# Altium PCB Sitara_Project_Rev_A_PCB.PcbDoc (part 4 of 9)
Units mm, origin at the board's own origin, x right, y up, seen from the top; angles counter-clockwise.
Board outline 120 x 85 mm, 8 copper layers (L1 (Sig), L2 (GND), L3 (PWR), L4 (Sig), L5 (GND), L6 (Sig), L7 (GND), L8 (Sig)), stack 1.188 mm thick; 458 components, 357 nets, 1916 pads, 1164 vias.
Unrouted connection lines stored in the file: 516.
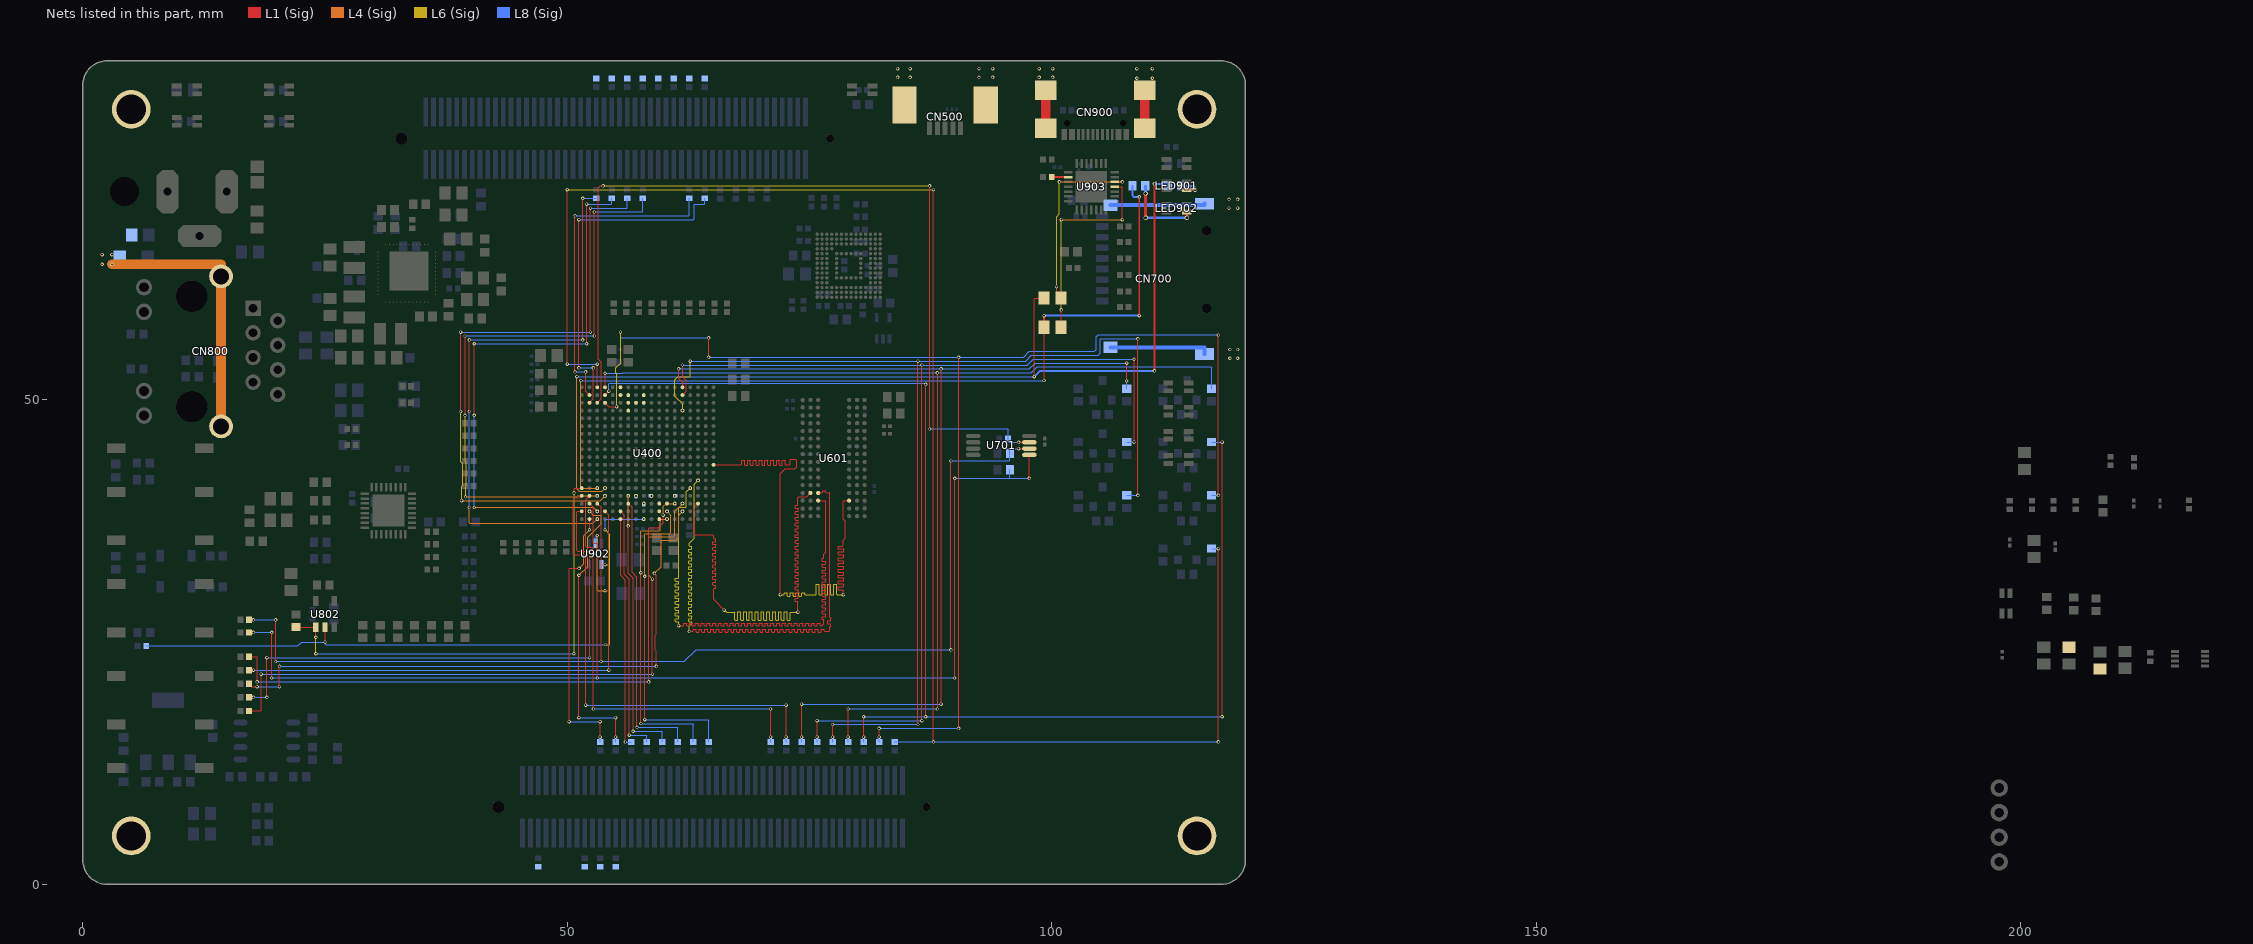
[diagram p7: the nets of this part, all layers, seen from the top]

## Part data
C300: library part CAP_22uF/25V/2012, "Ceramic CAP_22uF/25V/2012", JLCPCB Part Type="Basic Part", LCSC Part #=C45783
C301 C302 C303 C307 C308 C311 C315: library part CAP_100nF/50V/1608, "Ceramic CAP_100nF/50V/1608", JLCPCB Part Type="Basic Part", LCSC Part #=C14663
C304 C313 C316 C317 C318 C319 C320 C321 C322 C323 C324 C325 C328 C329 C414 C420 C427 C428 C448 C449 C464 C465 C701 C800: library part CAP_10uF/25V/1608, "Ceramic CAP_10uF/25V/1608", JLCPCB Part Type="Basic Part", LCSC Part #=C96446
C305 C309 C704 C710: library part CAP_10uF/10V/1608, "Ceramic CAP_10uF/10V/1608", JLCPCB Part Type="Basic Part", LCSC Part #=C19702
C306 C310 C326 C327 C709: library part CAP_2.2uF/16V/1608, "Ceramic CAP_2.2uF/16V/1608", JLCPCB Part Type="Basic Part", LCSC Part #=C23630
C312 C804: library part CAP_470pF/50V/1608, "Ceramic CAP_470pF/50V/1608", JLCPCB Part Type="Basic Part", LCSC Part #=C1620
C314 C803: library part CAP_1uF/50V/1608, "Ceramic CAP_1uF/50V/1608", JLCPCB Part Type="Basic Part", LCSC Part #=C15849
C400 C401 C405 C412 C413: library part CAP_1uF/16V/0603, "Ceramic CAP_1uF/16V/0603", JLCPCB Part Type="Extended Part", LCSC Part #=C307385
C402 C403 C404 C406 C407 C408 C409 C410 C411 C415 C416 C417 C418 C419 C421 C422 C423 C424 C425 C426 C429 C430 C431 C432 C433 C434 C435 C436 C437 C438 C439 C440 C441 C442 C443 C444 C445 C446 C447 C450 C451 C452 C453 C454 C455 C456 C457 C458 C459 C460 C461 C462 C463 C466 C467 C468 C469 C470 C471 C472 C473 C501 C502 C503 C505 C625 C700 C703 C900 C902 C905: library part CAP_100nF/25V/0603, "Ceramic CAP_100nF/25V/0603", JLCPCB Part Type="Extended Part", LCSC Part #=C181047
C500 C901 C903: library part CAP_4.7uF/10V/1005, "10V 4.7uF X5R ±20% 0402  Multilayer Ceramic Capacitors MLCC - SMD/SMT ROHS", JLCPCB Part Type="Basic Part", LCSC Part #=C23733
C504: library part CAP_1nF/50V/0603, "Ceramic CAP_1nF/50V/0603", JLCPCB Part Type="Extended Part", LCSC Part #=C85934
C600 C601 C603 C604 C605 C606 C607 C608 C609 C610 C611 C612 C613 C614 C615 C616 C617 C618 C619 C620 C621 C622 C623 C624: library part CAP_47nF/16V/0603, "16V 47nF X5R ±10% 0201 Multilayer Ceramic Capacitors MLCC - SMD/SMT ROHS", JLCPCB Part Type="Extended Part", LCSC Part #=C88917
C602: library part CAP_1nF/50V/1005, "Ceramic CAP_1nF/50V/1005", JLCPCB Part Type="Basic Part", LCSC Part #=C1523
C702 C705 C706 C707 C708 C711 C712 C713 C714 C801 C802 C808: library part CAP_100nF/16V/1005, "Ceramic CAP_100nF/16V/1005", JLCPCB Part Type="Basic Part", LCSC Part #=C1525
C805 C806: library part CAP_18pF/50V/1608, "Ceramic CAP_18pF/50V/1608", JLCPCB Part Type="Basic Part", LCSC Part #=C1647
C807: library part CAP_4.7uF/16V/1608, "Ceramic CAP_4.7uF/16V/1608", JLCPCB Part Type="Basic Part", LCSC Part #=C19666
C809 C810 C811 C812: library part CAP_10pF/50V/1608, "Ceramic CAP_10pF/50V/1608", JLCPCB Part Type="Basic Part", LCSC Part #=C1634
C813 C814: library part CAP_10nF/50V/1608, "Ceramic CAP_10nF/50V/1608", JLCPCB Part Type="Basic Part", LCSC Part #=C57112
C904: library part CAP_1uF/25V/1005, "Ceramic CAP_1uF/25V/1005", JLCPCB Part Type="Basic Part", LCSC Part #=C52923
C1000: library part CAP_1nF/2kV/3216, "Ceramic CAP_1nF/2kV/3216", JLCPCB Part Type="Basic Part", LCSC Part #=C9196
CN300: library part CON_DC-Jack, ComponentLink1Description="Manufacturer Link", ComponentLink1URL=http://www.cliffuk.co.uk/
CN500: library part CON_USB2.0-Mini-B, "USB - mini B USB 2.0 Receptacle Connector 5 Position Surface Mount, Right Angle", JLCPCB Part Type="Extended Part", LCSC Part #=C2692070
CN700: library part CON_MICRO-SD_Socket_TF-01A, "Card Slot MicroSD card (TF card) Self-bouncing SMD SD Card / Memory Card Connector ROHS", JLCPCB Part Type="Extended Part", LCSC Part #=C91145
CN800: library part CON_RJ45_HR911105A, "RJ45Receptacle 1 WithLED Plugin Ethernet Connectors / Modular Connectors (RJ45 RJ11) ROHS", JLCPCB Part Type="Extended Part", LCSC Part #=C12074
CN900: library part CON_USB-Type-C, "USB 2.0 5A 1 Surface Mount 16 Female -35℃~+75℃ Type-C SMD  USB Connectors ROHS", JLCPCB Part Type="Extended Part", LCSC Part #=C2977718
CN1000 CN1001: library part CON_BergStak-Lite(0.8mm)_MALE-100P(10144517-101802LF), JLCPCB Part Type="Extended Part"
CN1002: library part CON_PIN_HEADER_SINGLE-4PIN(2.54MM), "CON_PIN_HEADER_SINGLE-4PIN(2.54MM)"
D300 D301: library part DIO_B5819W, "40V 600mV@1A 1A SOD-123  Schottky Barrier Diodes (SBD) ROHS", JLCPCB Part Type="Basic Part", LCSC Part #=C8598
FB400 FB401 FB402 FB800: library part FB_BLM21PG121SN1D, "3A 1 30mΩ 120Ω@100MHz ±25% 0805  Ferrite Beads ROHS", JLCPCB Part Type="Extended Part", LCSC Part #=C79382
H1000 H1001 H1002 H1003: library part HOLE_PTH-3.0MM, "Plated-Through Hole 3mm"
L300 L301 L302: library part IND_LQM2HPN2R2MG0L, "2.2 µH Shielded Multilayer Inductor 1.3 A 100mOhm Max 1008 (2520 Metric)", JLCPCB Part Type="Extended Part", LCSC Part #=C86092
LED300 LED301 LED302 LED303 LED500 LED900: library part LED_MHT170RGBCT(GREEN), "Colorless transparence -30℃~+85℃ Positive post Common anode RGB 120° 0805  Light Emitting Diodes (LED) ROHS", JLCPCB Part Type="Extended Part", LCSC Part #=C2962094
LED501 LED502 LED503 LED504 LED901 LED902: library part LED_MHT170RGBCT(BLUE), "Colorless transparence -30℃~+85℃ Positive post Common anode RGB 120° 0805  Light Emitting Diodes (LED) ROHS", JLCPCB Part Type="Extended Part", LCSC Part #=C2962094
LED800: library part LED_RGB_MHT170RGBCT, "Colorless transparence -30℃~+85℃ Positive post Common anode RGB 120° 0805  Light Emitting Diodes (LED) ROHS", JLCPCB Part Type="Extended Part", LCSC Part #=C2962094
Q500 Q501 Q502 Q503 Q800 Q801 Q802: library part FET_2N7002, "60V 115mA 200mW 7.5Ω@10V,500mA N Channel SOT-23  MOSFETs ROHS", JLCPCB Part Type="Basic Part", LCSC Part #=C8545
R300 R309 R310 R311 R312 R313 R314 R315 R316 R317 R319 R336 R500 R717 R742 R836 R843 R844 R845 R846 R900 R903 R913 R914: library part RES_0R/2012/0.125W, "RES_0R/2012/0.125W", JLCPCB Part Type="Basic Part", LCSC Part #=C17477, Power Rating=0.125W, Precision=1%, Size=2012
R301 R304 R305 R514: library part RES_100K/1608/0.1W, "RES_100K/1608/0.1W", JLCPCB Part Type="Basic Part", LCSC Part #=C25803, Power Rating=0.1W, Precision=1%, Size=1608
R302 R303: library part RES_NC_10K/1608/0.1W, "RES_10K/1608/0.1W", Power Rating=0.1W, Precision=1%, Size=1608
R306: library part RES_680R/2012/0.125W, "RES_680R/2012/0.125W", JLCPCB Part Type="Basic Part", LCSC Part #=C17798, Power Rating=0.125W, Precision=1%, Size=2012
R307: library part RES_4.7K/1608/0.1W, "RES_4.7K/1608/0.1W", JLCPCB Part Type="Basic Part", LCSC Part #=C23162, Power Rating=0.1W, Precision=1%, Size=1608
R308 R322 R323 R324 R325 R329 R330 R332 R400 R401 R724 R817 R818 R910 R1003 R1009 R1010 R1011 R1012 R1013 R1014 R1015 R1016 R1017 R1018 R1019 R1020 R1021 R1022 R1023 R1027 R1028 R1029 R1030 R1031 R1032 R1033 R1034 R1035 R1036 R1037 R1038 R1039 R1041 R1042 R1044 R1045 R1046 R1047 R1048 R1049 R1050 R1052: library part RES_0R/1005/62.5mW, "RES_0R/1005/62.5mW", JLCPCB Part Type="Basic Part", LCSC Part #=C17168, Power Rating=62.5mW, Precision=1%, Size=1005
R318 R331 R334: library part RES_510R/1608/0.1W, "RES_510R/1608/0.1W", JLCPCB Part Type="Basic Part", LCSC Part #=C23193, Power Rating=0.1W, Precision=1%, Size=1608
R320 R321: library part RES_1.5K/2012/0.125W, "RES_1.5K/2012/0.125W", JLCPCB Part Type="Basic Part", LCSC Part #=C4310, Power Rating=0.125W, Precision=1%, Size=2012
R326: library part RES_200K/1608/0.1W, "RES_200K/1608/0.1W", JLCPCB Part Type="Basic Part", LCSC Part #=C25811, Power Rating=0.1W, Precision=1%, Size=1608
R327 R328 R518 R519 R702 R909: library part RES_4.7K/1005/62.5mW, "RES_4.7K/1005/62.5mW", JLCPCB Part Type="Basic Part", LCSC Part #=C25900, Power Rating=62.5mW, Precision=1%, Size=1005
R333: library part RES_330K/1608/0.1W, "RES_330K/1608/0.1W", JLCPCB Part Type="Basic Part", LCSC Part #=C23137, Power Rating=0.1W, Precision=1%, Size=1608
R335 R711 R718 R820 R821 R915: library part RES_0R/1608/0.1W, "RES_0R/1608/0.1W", JLCPCB Part Type="Basic Part", LCSC Part #=C21189, Power Rating=0.1W, Precision=1%, Size=1608
R337 R901 R902: library part RES_NC_0R/2012/0.125W, "0R/2012/0.125W/NC", Power Rating=0.1W, Precision=1%, Size=1608
R517 R823: library part RES_100R/1608/0.1W, "RES_100R/1608/0.1W", JLCPCB Part Type="Basic Part", LCSC Part #=C22775, Power Rating=0.1W, Precision=1%, Size=1608
R520 R907: library part RES_1K/1608/0.1W, "RES_1K/1608/0.1W", JLCPCB Part Type="Basic Part", LCSC Part #=C21190, Power Rating=0.1W, Precision=1%, Size=1608
R521 R541 R545 R723: library part RES_0R/0603/50mW, "50mW Thick Film Resistors 25V ±1% 0Ω 0201  Chip Resistor - Surface Mount ROHS", JLCPCB Part Type="Extended Part", LCSC Part #=C106227, Power Rating=50mW, Precision=1%, Size=0603
R535: library part RES_NC_100K/1608/0.1W, "RES_100K/1608/0.1W", Power Rating=0.1W, Precision=1%, Size=1608
R538 R601 R602 R603 R703 R704 R705 R706 R707 R708 R709 R720 R721 R722 R726 R727 R728 R729 R730 R731 R732 R733: library part RES_10K/1005/62.5mW, "RES_10K/1005/62.5mW", JLCPCB Part Type="Basic Part", LCSC Part #=C25744, Power Rating=62.5mW, Precision=1%, Size=1005
R539 R546 R549 R554 R833 R835 R838 R849 R850: library part RES_470R/1608/0.1W, "RES_470R/1608/0.1W", JLCPCB Part Type="Basic Part", LCSC Part #=C23179, Power Rating=0.1W, Precision=1%, Size=1608
R542 R547 R551 R555 R822 R847 R851 R853: library part RES_12K/1608/0.1W, "RES_12K/1608/0.1W", JLCPCB Part Type="Basic Part", LCSC Part #=C22790, Power Rating=0.1W, Precision=1%, Size=1608
R544 R548 R552 R556 R848 R852 R854: library part RES_22R/1608/0.1W, "RES_22R/1608/0.1W", JLCPCB Part Type="Basic Part", LCSC Part #=C23345, Power Rating=0.1W, Precision=1%, Size=1608
R600: library part RES_1.5K/1005/62.5mW, "RES_1.5K/1005/62.5mW", JLCPCB Part Type="Basic Part", LCSC Part #=C25867, Power Rating=62.5mW, Precision=1%, Size=1005
R604: library part RES_240R/1608/0.1W, "RES_240R/1608/0.1W", JLCPCB Part Type="Basic Part", LCSC Part #=C23350, Power Rating=0.1W, Precision=1%, Size=1608
R605 R839 R840 R841 R842: library part RES_49.9R/1005/62.5mW, "RES_49.9R/1005/62.5mW", JLCPCB Part Type="Basic Part", LCSC Part #=C25120, Power Rating=62.5mW, Precision=1%, Size=1005
R700 R701: library part RES_NC_4.7K/1608/0.1W, "RES_4.7K/1608/0.1W", Power Rating=0.1W, Precision=1%, Size=1608
R710 R712 R713 R714 R715 R716 R719 R725 R734 R735 R736 R737 R738 R739 R740 R741 R801 R802 R803 R804 R805: library part RES_22R/1005/62.5mW, "RES_22R/1005/62.5mW", JLCPCB Part Type="Basic Part", LCSC Part #=C25092, Power Rating=62.5mW, Precision=1%, Size=1005
R800 R806 R807 R808 R809 R810 R811 R812 R814 R816: library part RES_100R/1005/62.5mW, "RES_100R/1005/62.5mW", JLCPCB Part Type="Basic Part", LCSC Part #=C25076, Power Rating=62.5mW, Precision=1%, Size=1005
R813 R815: library part RES_NC_0R/1608/0.1W, "0R/1608/0.1W/NC", Power Rating=0.1W, Precision=1%, Size=1608
R819 R824 R829 R830 R831 R832 R834 R837 R908: library part RES_10K/1608/0.1W, "RES_10K/1608/0.1W", JLCPCB Part Type="Basic Part", LCSC Part #=C25804, Power Rating=0.1W, Precision=1%, Size=1608
R825 R826 R827 R828: library part RES_1.5K/1608/0.1W, "RES_1.5K/1608/0.1W", JLCPCB Part Type="Basic Part", LCSC Part #=C22843, Power Rating=0.1W, Precision=1%, Size=1608
R904: library part RES_100K/1005/62.5mW, "RES_100K/1005/62.5mW", JLCPCB Part Type="Basic Part", LCSC Part #=C25741, Power Rating=62.5mW, Precision=1%, Size=1005
R905 R906: library part RES_5.1K/1005/62.5mW, "RES_5.1K/1005/62.5mW", JLCPCB Part Type="Basic Part", LCSC Part #=C25905, Power Rating=62.5mW, Precision=1%, Size=1005
R911 R912: library part RES_680R/1608/0.1W, "RES_680R/1608/0.1W", JLCPCB Part Type="Basic Part", LCSC Part #=C23228, Power Rating=0.1W, Precision=1%, Size=1608
R1056: library part RES_1M/2012/0.125W, "RES_1M/2012/0.125W", JLCPCB Part Type="Basic Part", LCSC Part #=C17514, Power Rating=0.125W, Precision=1%, Size=2012
SW300 SW301 SW500 SW900: library part SW_K2-1102SP-C4SC-04(2P), "-25℃~+85℃ 6mm 5mm Round Button 50mA Brick nogging 6mm SPST 100MΩ 100000 250gf@±30gf 12V SMD  Tactile Switches ROHS", JLCPCB Part Type="Extended Part", LCSC Part #=C127509
U300: library part IC_PMIC_TPS65217CRSLR, "Battery Management, Display (LED Drivers), Handheld/Mobile Devices, Power Supply PMIC 48-VQFN (6x6)", JLCPCB Part Type="Extended Part", LCSC Part #=C116081
U301: library part IC_REG_AMS1117-3.3, "72dB@(120Hz) 1A 1.3V@(800mA) Fixed 3.3V~3.3V Positive 1 SOT-223  Linear Voltage Regulators (LDO) ROHS", JLCPCB Part Type="Basic Part", LCSC Part #=C6186
U302: library part IC_REG_MIC5209YM-TR, "Linear Voltage Regulator IC Positive Adjustable 1 Output 500mA 8-SOIC", JLCPCB Part Type="Extended Part", LCSC Part #=C461593
U400: library part IC_SOC_AM3358BZCZ100, "ARM® Cortex®-A8 Microprocessor IC Sitara™ 1 Core, 32-Bit 1.0GHz 324-NFBGA (15x15)", JLCPCB Part Type="Extended Part", LCSC Part #=C73932
U501: library part DIO_TVS_TPD4S012DRYR, "Clamp 3A (8/20µs) Ipp Tvs Diode Surface Mount 6-SON (1.45x1)", JLCPCB Part Type="Extended Part", LCSC Part #=C96506
U601: library part IC_MEM_DDR3L_D2516ECMDXGJD-U, "DRAM 4Gb 96 ball FBGA DDR3L 1866", JLCPCB Part Type="Extended Part", LCSC Part #=C2927180
U701: library part IC_EEPROM_AT24C16, "IC EEPROM 16KBIT I2C 1MHZ 8TSSOP", JLCPCB Part Type="Extended Part", LCSC Part #=C112954
U702: library part IC_BUF_SN74LVC1G06DCKR, "Inverter IC 1 Channel Open Drain SC-70-5", JLCPCB Part Type="Extended Part", LCSC Part #=C7828
U703: library part IC_eMMC_MTFC32GAZAQHD-WT, "FLASH - NAND Memory IC 256Gbit MMC 200 MHz 153-VFBGA (11.5x13)", JLCPCB Part Type="Extended Part", LCSC Part #=C5330430
U800: library part IC_ETH_LAN8710A-EZC-TR, "4/4 Transceiver Full MII, RMII 32-QFN (5x5)", JLCPCB Part Type="Extended Part", LCSC Part #=C46185
U802: library part IC_AND_SN74AHC1G09DBVR, "AND Gate IC 1 Channel Open Drain SOT-23-5", JLCPCB Part Type="Extended Part", LCSC Part #=C840099
U900: library part IC_BUF_SN74LVC2G241DCUR, "Buffer, Non-Inverting 2 Element 1 Bit per Element 3-State Output 8-VSSOP", JLCPCB Part Type="Extended Part", LCSC Part #=C10430
U902: library part IC_BUF_SN74LVC1G07DCKR, "Buffer, Non-Inverting 1 Element 1 Bit per Element Open Drain Output SC-70-5", JLCPCB Part Type="Extended Part", LCSC Part #=C7830
U903: library part IC_USB_CP2102, "Transceiver 1Mbps USB 1/1 QFN-28_5x5x05P  USB ICs ROHS", JLCPCB Part Type="Basic Part", LCSC Part #=C6568
X500: library part OSC_SX2M24.000M20F30TNN(24MHz), "1.62V~3.63V ±20ppm 10mA ±30ppm CMOS 24MHz SMD2520-4P  Crystal Oscillators ROHS", JLCPCB Part Type="Extended Part", LCSC Part #=C2901600
X501: library part OSC_SX2M32.768KM20F30TNN(32.768kHz), "1.62V~3.63V ±20ppm 90uA ±30ppm CMOS 32.768kHz SMD2520-4P  Crystal Oscillators ROHS", JLCPCB Part Type="Extended Part", LCSC Part #=C2901603
X800: library part XTAL_25MHz_X322525MOB4SI, "25MHz Surface Mount Crystal 12pF ±10ppm ±20ppm SMD3225-4P Crystals ROHS", JLCPCB Part Type="Basic Part", LCSC Part #=C9006

## Via types
v1: diameter 0.35, hole 0.2, L1 (Sig) to L8 (Sig), tented both sides, 846 vias
v2: diameter 0.45, hole 0.3, L1 (Sig) to L8 (Sig), tented both sides, 302 vias
v3: diameter 0.45/0.45/0.45/0.45/0.45/0.45/0.45/0.45 (per signal layer), hole 0.3, L1 (Sig) to L8 (Sig), tented both sides, 16 vias

## Nets (pads, with @x,y where several pads share a name; then routed paths per layer and width w, separated by ;. In a path a pad name is that pad's centre, name@x,y a point inside that pad or via, vN(x,y) a via of type N, cw(c..) or ccw(c..) an arc to the next point about the centre after c; other vN are vias at no path point)
AIN1: R1003.2 U400.C7
AIN2: R1023.1 U400.B7 | length 33.1
  L1 (Sig) w0.1: v1(58,17) v1(58,31.8)
  L4 (Sig) w0.1: v1(58,31.8) 58,36.141 58.059,36.2 60.6,36.2 60.7,36.3 60.7,38.1 v1(60.3,38.5)
  L8 (Sig) w0.1: v1(58,17) 64.541,17 64.6,16.941 R1023.1@64.6,14.69
AIN3: R1022.1 U400.A7 | length 31
  L1 (Sig) w0.1: v1(57.6,16.6) v1(57.6,32.162)
  L4 (Sig) w0.1: v1(57.6,32.162) 57.6,36.441 57.659,36.5 59.541,36.5 59.6,36.559 59.6,37.641 59.659,37.7 v1(60.3,37.7)
  L8 (Sig) w0.1: v1(57.6,16.6) 62.941,16.6 63,16.541 R1022.1@63,14.69
AIN4: R1009.2 U400.C8
AIN5: R1011.2 U400.B8
AIN6: R1013.2 U400.A8
AM3_EEPROM_WP: R702.1 U400.T16 U701.7 | length 93.5
  L1 (Sig) w0.1: U400.T16@53.1,49.7 53.5,50.1 53.5,53.9 53.2,54.2 53.2,71.9 53.4,72.1 v1(53.7,72.1) ; v1(87.4,47) v1(87.4,72.1) ; v1(96.6,45.625) U701.7@97.7,45.625
  L6 (Sig) w0.1: v1(53.7,72.1) v1(87.4,72.1)
  L8 (Sig) w0.1: v1(87.4,47) 95.441,47 95.5,46.941 R702.1@95.5,46 95.5,45.625 v1(96.6,45.625)
AM3_GPIO0_22: R1027.1 U400.U10
AM3_GPIO0_23: R1030.1 U400.T10
AM3_GPIO0_26: R1033.1 U400.T11
AM3_GPIO0_27: R1036.1 U400.U12
AM3_GPIO1_12: R1039.1 U400.T12
AM3_GPIO1_13: R1042.1 U400.R12
AM3_GPIO1_14: R1045.1 U400.V13
AM3_GPIO1_15: R1048.1 U400.U13
AM3_GPIO_ETH_PHY_RESET: R837.1 U400.E18 U802.1 | length 49.3
  L1 (Sig) w0.1: R837.1@22,26.55 U802.1@24.05,26.55 v1(24.05,25.5) ; v1(50.7,40.4) 50.7,40.841 50.759,40.9 U400.E18@51.5,40.9
  L6 (Sig) w0.1: v1(24.05,23.8) v1(24.05,25.5) ; v1(50.7,23.8) v1(50.7,40.4)
  L8 (Sig) w0.1: v1(24.05,23.8) v1(50.7,23.8)
AM3_I2C0_SCL: R322.2 R700.1 U400.C16 U701.6 | length 122.6
  L1 (Sig) w0.1: R322.2@17.14,27.3 v1(17.6,27.3) ; v1(19.9,23) v1(19.9,27.3) ; U400.C16@53.1,39.3 53.5,38.9 v1(53.5,23) ; v1(89.6,24.2) v1(89.6,43.7) ; v1(96.6,44.975) U701.6@97.7,44.975
  L8 (Sig) w0.1: v1(17.6,27.3) v1(19.9,27.3) ; v1(19.9,23) v1(53.5,23) 62.1,23 63.3,24.2 v1(89.6,24.2) ; v1(89.6,43.7) 95.641,43.7 95.7,43.759 R700.1@95.7,44.5 95.7,44.975 v1(96.6,44.975)
AM3_I2C0_SDA: R323.2 R701.1 U400.C17 U701.5 | length 127.7
  L1 (Sig) w0.1: R323.2@17.14,26 v1(17.6,26) ; v1(19.5,21.3) v1(19.5,26) ; U400.C17@52.3,39.3 52.7,38.9 52.7,35.259 52.759,35.2 53.041,35.2 53.1,35.141 v1(53.1,21.3) ; v1(90,21.3) v1(90,41.9) ; v1(97.7,41.9) U701.5@97.7,44.325
  L8 (Sig) w0.1: v1(17.6,26) v1(19.5,26) ; v1(19.5,21.3) v1(53.1,21.3) v1(90,21.3) ; v1(90,41.9) 95.7,41.9 ; R701.1@95.7,42.8 95.7,41.9 ; v1(97.7,41.9) 95.7,41.9
AM3_I2C1_SCL: R1028.2 U400.A16 | length 60
  L1 (Sig) w0.1: v1(39.9,48.8) v1(39.9,56.2) ; v1(51.6,56.2) v1(51.6,70.8)
  L4 (Sig) w0.1: v1(39.9,38.9) 39.9,37.309 39.959,37.25 52.65,37.25 v1(53.1,37.7)
  L8 (Sig) w0.1: v1(39.9,38.9) v1(39.9,48.8) ; v1(39.9,56.2) v1(51.6,56.2) ; v1(51.6,70.8) 52.99,70.8 R1028.2@53,70.81
AM3_I2C1_SDA: R1031.2 U400.B16 | length 58.9
  L1 (Sig) w0.1: v1(40.4,48.4) v1(40.4,55.8) ; v1(52,55.8) v1(52,70.2)
  L4 (Sig) w0.1: v1(40.4,38.9) 52.7,38.9 v1(53.1,38.5)
  L8 (Sig) w0.1: v1(40.4,38.9) v1(40.4,48.4) ; v1(40.4,55.8) v1(52,55.8) ; v1(52,70.2) 54.541,70.2 54.6,70.259 R1031.2@54.6,70.81
AM3_I2C2_SCL: R1029.1 U400.D17 | length 44.6
  L1 (Sig) w0.1: U400.D17@52.3,40.1 51.9,39.7 51.9,34.9 52,34.8 52.6,34.8 52.7,34.7 v1(52.7,18.1) ; v1(71,15.2) v1(71,18.1)
  L8 (Sig) w0.1: v1(52.7,18.1) v1(71,18.1) ; R1029.1@71,14.69 v1(71,15.2)
AM3_I2C2_SDA: R1032.1 U400.D18 | length 47.9
  L1 (Sig) w0.1: U400.D18@51.5,40.1 51.491,40.1 51.291,39.9 50.9,39.9 50.6,39.6 50.6,34.059 50.659,34 51.841,34 51.9,33.941 v1(51.9,18.5) ; v1(72.6,15.2) v1(72.6,18.5)
  L8 (Sig) w0.1: v1(51.9,18.5) v1(72.6,18.5) ; R1032.1@72.6,14.69 v1(72.6,15.2)
AM3_PMIC_LDO_PGOOD: R329.2 U400.B5 | length 62.5
  L1 (Sig) w0.1: R329.2@17.14,20.7 17.14,20.68 17.39,20.43 17.41,20.43 17.44,20.4 v1(18,20.4) ; v1(20.3,20.4) v1(20.3,22.5) ; v1(59,32.1) 59,32.04 59.2,31.84 59.2,25.8 59.1,25.7 59.1,24.184 59.2,24.084 v1(59.2,22.5)
  L4 (Sig) w0.1: v1(59,32.1) 59.7,32.8 59.7,35.441 59.759,35.5 61.2,35.5 61.5,35.8 61.5,38.1 v1(61.9,38.5)
  L8 (Sig) w0.1: v1(18,20.4) v1(20.3,20.4) ; v1(20.3,22.5) v1(59.2,22.5)
AM3_PMIC_nINT: R330.2 U400.B18 | length 56
  L1 (Sig) w0.1: R330.2@17.14,19.3 v1(17.6,19.3) ; v1(19,19.3) v1(19,23.4) ; U400.B18@51.5,38.5 51.1,38.5 51,38.4 51,34.459 51.059,34.4 52.241,34.4 52.3,34.341 v1(52.3,23.4)
  L8 (Sig) w0.1: v1(17.6,19.3) v1(19,19.3) ; v1(19,23.4) v1(52.3,23.4)
AM3_PMIC_nWAKEUP: R332.2 U400.C5 | length 66.1
  L1 (Sig) w0.1: R332.2@17.14,17.9 18.341,17.9 18.4,17.959 v1(18.4,21.7) ; v1(58.8,21.7) v1(58.8,31.5)
  L4 (Sig) w0.1: v1(58.8,31.5) 58.4,31.9 58.4,35.841 58.459,35.9 61,35.9 61.1,36 61.1,38.5 v1(61.9,39.3)
  L8 (Sig) w0.1: v1(18.4,21.7) v1(58.8,21.7)
AM3_PMIC_PGOOD: R325.2 U400.B15 U902.2 | length 61.5
  L1 (Sig) w0.1: R325.2@17.14,22.1 v1(17.6,22.1) ; v1(53.9,30.3) 54.3,30.3 ; U400.B15@53.9,38.5 54.3,38.1 54.3,30.3 ; v1(54.3,22.1) 54.3,30.3
  L6 (Sig) w0.1: v1(53.1,36) 53.1,30.359 53.159,30.3 v1(53.9,30.3)
  L8 (Sig) w0.1: v1(17.6,22.1) v1(54.3,22.1) ; U902.2@52.9,35.2 52.9,35.8 v1(53.1,36)
AM3_PMIC_PWR_EN: R324.2 U400.C6 | length 64.5
  L1 (Sig) w0.1: R324.2@17.14,23.5 18,23.5 v1(18,20.9) ; v1(58.4,20.9) 58.4,36.741 58.459,36.8 59.4,36.8 59.9,37.3 v1(59.9,38.1)
  L4 (Sig) w0.1: v1(59.9,38.1) 59.9,39 60.2,39.3 v1(61.1,39.3)
  L8 (Sig) w0.1: v1(18,20.9) v1(58.4,20.9)
AM3_SPI1_CS0: R1020.1 U400.C12 | length 29.1
  L1 (Sig) w0.1: U400.C12@56.3,39.3 56.7,38.9 56.7,32.2 57.2,31.7 v1(57.2,16.2)
  L8 (Sig) w0.1: v1(57.2,16.2) 61.341,16.2 61.4,16.141 R1020.1@61.4,14.69
AM3_SPI1_D0: R1016.1 U400.B13 | length 25.9
  L1 (Sig) w0.1: U400.B13@55.5,38.5 55.9,38.1 55.9,32 56.4,31.5 v1(56.4,15.4)
  L8 (Sig) w0.1: v1(56.4,15.4) 58.141,15.4 58.2,15.341 R1016.1@58.2,14.69
AM3_SPI1_D1: R1018.1 U400.D12 | length 28.6
  L1 (Sig) w0.1: v1(56.3,37) 56.3,32.1 56.8,31.6 v1(56.8,15.8)
  L4 (Sig) w0.1: v1(56.3,37) v1(56.3,40.1)
  L8 (Sig) w0.1: v1(56.8,15.8) 59.741,15.8 59.8,15.741 R1018.1@59.8,14.69
AM3_SPI1_SCLK: R1014.1 U400.A13 | length 23.8
  L1 (Sig) w0.1: U400.A13@55.5,37.7 55.5,31.9 56,31.4 v1(56,14.69)
  L8 (Sig) w0.1: v1(56,14.69) R1014.1@56.6,14.69
AM3_STATUS_LED_B: R854.1 R1041.1 U400.R5 | length 120.2
  L1 (Sig) w0.1: v1(77.4,15.2) v1(77.4,16.5) ; v1(86.2,16.5) v1(86.2,54) ; v1(108.9,40.15) v1(108.9,56.3)
  L6 (Sig) w0.1: v1(61.9,48.9) 61.9,49.6 61.1,50.4 61.1,52.1 61.4,52.4 62.641,52.4 62.7,52.459 v1(62.7,54)
  L8 (Sig) w0.1: v1(62.7,54) v1(86.2,54) 97.3,54 97.9,54.6 104.8,54.6 105,54.8 105,56.241 105.059,56.3 v1(108.9,56.3) ; R1041.1@77.4,14.69 v1(77.4,15.2) ; v1(77.4,16.5) v1(86.2,16.5) ; R854.1@107.75,40.15 v1(108.9,40.15)
AM3_STATUS_LED_G: R852.1 R1038.1 U400.U5 | length 109.3
  L1 (Sig) w0.1: U400.U5@61.9,50.5 62.3,50.9 62.3,52 61.9,52.4 v1(61.9,53.6) ; v1(75.8,15.2) v1(75.8,16.9) ; v1(86.6,16.9) v1(86.6,53.6) ; v1(108.5,45.65) v1(108.5,54.2)
  L8 (Sig) w0.1: v1(61.9,53.6) v1(86.6,53.6) 97.5,53.6 98.1,54.2 v1(108.5,54.2) ; R1038.1@75.8,14.69 v1(75.8,15.2) ; v1(75.8,16.9) v1(86.6,16.9) ; R852.1@107.75,45.65 v1(108.5,45.65)
AM3_STATUS_LED_R: R848.1 R1035.1 U400.V5 | length 104.1
  L1 (Sig) w0.1: v1(61.5,53.2) 61.5,52.2 61.9,51.8 U400.V5@61.9,51.3 ; v1(74.2,15.2) v1(74.2,18.6) ; v1(88.6,18.6) v1(88.6,53.2) ; v1(107.75,51.95) v1(107.75,53.8)
  L8 (Sig) w0.1: v1(61.5,53.2) v1(88.6,53.2) 97.7,53.2 98.3,53.8 v1(107.75,53.8) ; R1035.1@74.2,14.69 v1(74.2,15.2) ; v1(74.2,18.6) v1(88.6,18.6) ; R848.1@107.75,51.15 v1(107.75,51.95)
AM3_UART0_RX: R901.2 R911.1 R913.2 U400.E15 | length 104.5
  L1 (Sig) w0.1: v1(98.2,52.4) 98.2,60.441 98.259,60.5 R913.2@99.225,60.5
  L1 (Sig) w0.2: v1(110.6,53) v1(110.6,72.3)
  L4 (Sig) w0.1: v1(51,52.4) 51,40.807 51.259,40.548 53.548,40.548 v1(53.9,40.9)
  L8 (Sig) w0.1: v1(51,52.4) v1(98.2,52.4)
  L8 (Sig) w0.2: v1(98.2,52.4) 98.8,53 v1(110.6,53) ; v1(110.6,72.3) 111.838,72.3 R911.1@112.038,72.1
AM3_UART0_TX: R902.1 R912.1 R914.2 U400.E16 | length 91.1
  L1 (Sig) w0.1: v1(99.225,52) R914.2@99.225,57.5
  L1 (Sig) w0.2: R914.2@99.225,57.5 v1(99.225,58.7) ; v1(109.043,58.7) v1(109.043,70.957)
  L4 (Sig) w0.1: v1(51.4,52) 51.4,41 51.5,40.9 v1(53.1,40.9)
  L8 (Sig) w0.1: v1(51.4,52) v1(99.225,52)
  L8 (Sig) w0.2: v1(99.225,58.7) v1(109.043,58.7) ; R912.1@108.35,72.1 108.35,71.074 108.467,70.957 v1(109.043,70.957)
AM3_UART1_RX: R1037.2 U400.D16 | length 62.9
  L1 (Sig) w0.1: v1(39.452,48.4) v1(39.452,56.602) ; v1(52.8,56.602) v1(52.8,69.4)
  L4 (Sig) w0.1: v1(39.5,40) 51,40 51.1,40.1 v1(53.1,40.1)
  L6 (Sig) w0.1: v1(39.452,48.4) 39.452,43.648 39.6,43.5 39.6,41.1 39.5,41 v1(39.5,40)
  L8 (Sig) w0.1: v1(39.452,56.602) v1(52.8,56.602) ; v1(52.8,69.4) 57.741,69.4 57.8,69.459 R1037.2@57.8,70.81
AM3_UART1_TX: R1034.2 U400.D15 | length 63.5
  L1 (Sig) w0.1: v1(39,48.8) v1(39,57) ; v1(52.4,57) v1(52.4,69.8)
  L4 (Sig) w0.1: v1(39.1,39.6) 53.4,39.6 v1(53.9,40.1)
  L6 (Sig) w0.1: v1(39,48.8) 39,43.6 39.2,43.4 39.2,41.2 39.1,41.1 v1(39.1,39.6)
  L8 (Sig) w0.1: v1(39,57) v1(52.4,57) ; v1(52.4,69.8) 56.141,69.8 56.2,69.859 R1034.2@56.2,70.81
AM3_UART2_RX: R1010.1 U400.A17 | length 27.6
  L1 (Sig) w0.1: v1(50.2,16.8) 50.2,32.562 50.259,32.621 v1(51.221,32.621) ; v1(52.3,36.6) U400.A17@52.3,37.7 ; v1(53.4,15.2) v1(53.4,16.8)
  L4 (Sig) w0.1: v1(51.221,32.621) 51.7,33.1 51.7,36 v1(52.3,36.6)
  L8 (Sig) w0.1: v1(50.2,16.8) v1(53.4,16.8) ; R1010.1@53.4,14.69 v1(53.4,15.2)
AM3_UART2_TX: R1012.1 U400.B17 | length 29.5
  L1 (Sig) w0.1: v1(51.2,17.2) v1(51.2,31.9) ; v1(55,15.2) v1(55,17.2)
  L4 (Sig) w0.1: v1(51.2,31.9) 52.1,32.8 52.1,35.8 53.5,37.2 53.5,38.041 53.441,38.1 52.7,38.1 v1(52.3,38.5)
  L8 (Sig) w0.1: v1(51.2,17.2) v1(55,17.2) ; R1012.1@55,14.69 v1(55,15.2)
AM3_UART4_RX: R1049.2 U400.T17 | length 35.6
  L1 (Sig) w0.1: v1(51.2,53.3) v1(51.2,68.6) ; U400.T17@52.3,49.7 52.7,50.1 v1(52.7,53.3)
  L8 (Sig) w0.1: v1(51.2,53.3) v1(52.7,53.3) ; v1(51.2,68.6) 63,68.6 63.1,68.7 63.1,70.141 63.159,70.2 64.141,70.2 64.2,70.259 R1049.2@64.2,70.81
AM3_UART4_TX: R1046.2 U400.U17 | length 33.3
  L1 (Sig) w0.1: v1(50.8,52.9) v1(50.8,69) ; v1(51.9,52.9) 51.9,50.9 U400.U17@52.3,50.5
  L8 (Sig) w0.1: v1(50.8,52.9) v1(51.9,52.9) ; v1(50.8,69) 62.541,69 62.6,69.059 R1046.2@62.6,70.81
AM3_USER_LED1: R544.1 R1044.1 U400.V15 | length 113.8
  L1 (Sig) w0.1: U400.V15@53.9,51.3 v1(53.9,52.752) ; v1(79,15.2) v1(79,18.1) ; v1(88.2,18.1) v1(88.2,52.8)
  L8 (Sig) w0.1: v1(53.9,52.752) 55.25,52.752 55.254,52.748 55.748,52.748 55.8,52.8 v1(88.2,52.8) 97.9,52.8 98.5,53.4 116.441,53.4 116.5,53.341 R544.1@116.5,51.15 ; R1044.1@79,14.69 v1(79,15.2) ; v1(79,18.1) v1(88.2,18.1)
AM3_USER_LED2: R548.1 R1047.1 U400.U15 | length 137.4
  L1 (Sig) w0.1: U400.U15@53.9,50.5 v1(54.3,50.9) ; v1(80.6,15.2) v1(80.6,17.3) ; v1(87,17.3) v1(87,51.6) ; v1(117.6,17.3) v1(117.6,45.65)
  L8 (Sig) w0.1: v1(54.3,50.9) 54.3,51.641 54.359,51.7 86.9,51.7 v1(87,51.6) ; R1047.1@80.6,14.69 v1(80.6,15.2) ; v1(80.6,17.3) v1(87,17.3) v1(117.6,17.3) ; R548.1@116.5,45.65 v1(117.6,45.65)
AM3_USER_LED3: R552.1 R1050.1 U400.T15 | length 140.5
  L1 (Sig) w0.1: U400.T15@53.9,49.7 54.3,49.3 v1(55.1,49.3) ; v1(64.6,54.4) v1(64.6,56.4) ; v1(82.2,15.2) v1(82.2,16.1) ; v1(90.4,16.1) v1(90.4,54.4) ; v1(117.2,40.15) v1(117.2,56.7)
  L6 (Sig) w0.1: v1(55.1,49.3) 55.1,52.7 55,52.8 55,53.3 55.5,53.8 v1(55.5,57)
  L8 (Sig) w0.1: v1(55.5,57) 55.5,56.459 55.559,56.4 v1(64.6,56.4) ; v1(64.6,54.4) v1(90.4,54.4) 97.1,54.4 97.7,55 104.4,55 104.6,55.2 104.6,56.5 104.8,56.7 v1(117.2,56.7) ; R1050.1@82.2,14.69 v1(82.2,15.2) ; v1(82.2,16.1) v1(90.4,16.1) ; R552.1@116.5,40.15 v1(117.2,40.15)
AM3_USER_LED4: R556.1 R1052.1 U400.V16 | length 172.4
  L1 (Sig) w0.1: v1(50,53.7) v1(50,71.7) ; U400.V16@53.1,51.3 v1(53.1,53.7) ; v1(87.8,14.7) v1(87.8,71.7) ; v1(117.2,14.7) v1(117.2,34.65)
  L6 (Sig) w0.1: v1(50,71.7) v1(87.8,71.7)
  L8 (Sig) w0.1: v1(50,53.7) v1(53.1,53.7) ; R1052.1@83.8,14.69 83.81,14.7 v1(87.8,14.7) v1(117.2,14.7) ; R556.1@116.5,34.65 v1(117.2,34.65)
AM3_WARM_nRESET: R910.2 U400.A10 U802.2 U902.4 | length 67.8
  L1 (Sig) w0.1: v1(25,25) U802.2@25,26.55
  L6 (Sig) w0.1: v1(53.9,33) 54.4,33 ; v1(53.9,36.6) 54.4,36.1 54.4,33 ; v1(53.948,24.752) 53.996,24.704 54.237,24.704 54.241,24.7 54.341,24.7 54.4,24.759 54.4,33
  L8 (Sig) w0.1: R910.2@6.54,24.6 22.2,24.6 22.6,25 v1(25,25) 25.048,24.952 25.048,24.833 25.129,24.752 v1(53.948,24.752) ; U902.4@53.55,33 v1(53.9,33) ; v1(53.9,36.6) 53.9,37.641 53.959,37.7 v1(57.9,37.7)
CAP_VBB_MPU: C401.1 U400.C10
  other v1: 57.9,39.3
CAP_VDD_RTC: C400.1 U400.D6
  other v1: 61.1,40.1
CAP_VDD_SRAM_CORE: C413.1 U400.D9
  other v1: 58.7,40.1
CAP_VDD_SRAM_MPU: C412.1 U400.D11
  other v1: 57.1,40.1
CGND: C1000.1 CN500.S1 CN500.S2 CN700.10 CN700.11 CN700.12 CN700.13 CN800.13 CN800.14 CN900.S1 CN900.S2 CN900.S3 CN900.S4 H1000.1 H1001.1 H1002.1 H1003.1 R1056.1 | length 56.1
  L1 (Sig) w1: CN900.S4@99.39,78.05 CN900.S3@99.39,81.95 ; CN900.S1@109.61,78.05 CN900.S2@109.61,81.95
  L4 (Sig) w1: v1(3,64) 14.27,64 CN800.13@14.27,62.75 CN800.14@14.27,47.26
  L8 (Sig) w0.4: CN700.13@106.074,55.419 115.776,55.419 CN700.12@115.776,54.74 ; CN700.10@106.074,70.099 115.776,70.099 CN700.11@115.776,70.26
  other v1: 118.4,54.3 119.2,54.3 118.4,55.2 119.2,55.2 2,64 2,65 3,65 118.3,69.8 119.2,69.8 118.3,70.7 119.2,70.7 108.8,83.2 110.4,83.2 84.1,83.3 85.4,83.3 92.5,83.3 93.9,83.3 98.7,83.3 100.1,83.3 84.1,84.2 85.4,84.2 92.5,84.2 93.9,84.2 98.7,84.2 100.1,84.2 108.8,84.2 110.4,84.2
CP2102_RST: R909.2 U903.9 | length 1.7
  L1 (Sig) w0.2: R909.2@100,73 U903.9@101.7,73
CP2102_RXD: R914.1 U903.25 | length 21.6
  L1 (Sig) w0.1: R914.1@100.975,57.5 101,57.525 v1(101,59.3) ; U903.25@106.5,72 107.241,72 107.3,71.941 v1(107.3,68.6)
  L4 (Sig) w0.1: v1(101,68.6) v1(107.3,68.6)
  L6 (Sig) w0.1: v1(101,59.3) v1(101,68.6)
CP2102_RXD_LED: LED902.3 R912.2 | length 8.2
  L1 (Sig) w0.3: v2(109.7,68.8) v2(109.7,71.3) ; v2(113.95,68.8) LED902.3@113.95,69.4
  L8 (Sig) w0.2: R912.2@109.65,72.1 R912.2@109.7,72.05
  L8 (Sig) w0.3: v2(109.7,68.8) v2(113.95,68.8) ; v2(109.7,71.3) R912.2@109.7,72.05
CP2102_TXD: R913.1 U903.26 | length 19.9
  L1 (Sig) w0.1: v1(100.5,61.7) 100.5,60.5 R913.1@100.975,60.5 ; U903.26@106.5,72.5 v1(107.3,72.5)
  L4 (Sig) w0.1: v1(100.8,72.5) v1(107.3,72.5)
  L6 (Sig) w0.1: v1(100.5,61.7) 100.5,68.9 100.8,69.2 v1(100.8,72.5)
CP2102_TXD_LED: LED901.3 R911.2 | length 2.6
  L1 (Sig) w0.3: LED901.3@113.95,71.7 v2(114.8,71.7)
  L8 (Sig) w0.2: R911.2@113.338,72.1 114.683,72.1 114.771,72.012 114.771,71.729 v2(114.8,71.7)
DDR_A0: U400.F3 U601.N3 | length 66.3
  L1 (Sig) w0.1: v1(62.6,26.1) 62.895,26.1 62.945,26.1 63.004,26.159 63.004,26.32 63.034,26.35 63.274,26.35 63.304,26.32 63.304,26.067 63.334,26.037 63.574,26.037 63.604,26.067 63.604,26.32 63.634,26.35 63.874,26.35 63.904,26.32 63.904,26.067 63.934,26.037 64.174,26.037 64.204,26.067 64.204,26.32 64.234,26.35 64.474,26.35 64.504,26.32 64.504,26.067 64.534,26.037 64.774,26.037 64.804,26.067 64.804,26.32 64.834,26.35 65.074,26.35 65.104,26.32 65.104,26.067 65.134,26.037 65.374,26.037 65.404,26.067 65.404,26.32 65.434,26.35 65.674,26.35 65.704,26.32 65.704,26.067 65.734,26.037 65.974,26.037 66.004,26.067 66.004,26.32 66.034,26.35 66.274,26.35 66.304,26.32 66.304,26.067 66.334,26.037 66.574,26.037 66.604,26.067 66.604,26.32 66.634,26.35 66.874,26.35 66.904,26.32 66.904,26.067 66.934,26.037 67.174,26.037 67.204,26.067 67.204,26.32 67.234,26.35 67.474,26.35 67.504,26.32 67.504,26.067 67.534,26.037 67.774,26.037 67.804,26.067 67.804,26.32 67.834,26.35 68.074,26.35 68.104,26.32 68.104,26.067 68.134,26.037 68.374,26.037 68.404,26.067 68.404,26.32 68.434,26.35 68.674,26.35 68.704,26.32 68.704,26.067 68.734,26.037 68.974,26.037 69.004,26.067 69.004,26.32 69.034,26.35 69.274,26.35 69.304,26.32 69.304,26.067 69.334,26.037 69.574,26.037 69.604,26.067 69.604,26.32 69.634,26.35 69.874,26.35 69.904,26.32 69.904,26.067 69.934,26.037 70.174,26.037 70.204,26.067 70.204,26.32 70.234,26.35 70.474,26.35 70.504,26.32 70.504,26.067 70.534,26.037 70.774,26.037 70.804,26.067 70.804,26.32 70.834,26.35 71.074,26.35 71.104,26.32 71.104,26.067 71.134,26.037 71.374,26.037 71.404,26.067 71.404,26.32 71.434,26.35 71.674,26.35 71.704,26.32 71.704,26.067 71.734,26.037 71.974,26.037 72.004,26.067 72.004,26.32 72.034,26.35 72.274,26.35 72.304,26.32 72.304,26.067 72.334,26.037 72.574,26.037 72.604,26.067 72.604,26.32 72.634,26.35 72.874,26.35 72.904,26.32 72.904,26.067 72.934,26.037 73.174,26.037 73.204,26.067 73.204,26.32 73.234,26.35 73.474,26.35 73.504,26.32 73.504,26.067 73.534,26.037 73.774,26.037 73.804,26.067 73.804,26.32 73.834,26.35 74.074,26.35 74.104,26.32 74.104,26.067 74.134,26.037 74.374,26.037 74.404,26.067 74.404,26.32 74.434,26.35 74.674,26.35 74.704,26.32 74.704,26.067 74.734,26.037 74.974,26.037 75.004,26.067 75.004,26.32 75.034,26.35 75.274,26.35 75.304,26.32 75.304,26.067 75.334,26.037 75.574,26.037 75.604,26.067 75.604,26.32 75.634,26.35 75.874,26.35 75.904,26.32 75.904,26.067 75.934,26.037 76.174,26.037 76.204,26.067 76.204,26.32 76.234,26.35 76.474,26.35 76.504,26.32 76.504,26.159 76.562,26.1 77,26.1 77.041,26.1 77.1,26.159 77.1,26.4 77.1,26.533 77.159,26.591 77.174,26.591 77.189,26.606 77.189,26.876 77.174,26.891 76.912,26.891 76.897,26.906 76.897,27.176 76.912,27.191 77.174,27.191 77.189,27.206 77.189,27.476 77.174,27.491 77.159,27.491 77.1,27.55 77.1,27.6 77.1,40.341 77.041,40.4 77.03,40.4 76.709,40.4 76.65,40.459 76.65,40.585 76.635,40.6 76.365,40.6 76.35,40.585 76.35,40.459 76.291,40.4 76.241,40.4 U601.N3@75.9,40.4
  L6 (Sig) w0.1: v1(62.6,26.1) 62.6,26.391 62.6,26.741 62.659,26.8 62.8,26.8 62.83,26.83 62.83,27.07 62.8,27.1 62.575,27.1 62.545,27.13 62.545,27.37 62.575,27.4 62.8,27.4 62.83,27.43 62.83,27.67 62.8,27.7 62.575,27.7 62.545,27.73 62.545,27.97 62.575,28 62.8,28 62.83,28.03 62.83,28.27 62.8,28.3 62.575,28.3 62.545,28.33 62.545,28.57 62.575,28.6 62.8,28.6 62.83,28.63 62.83,28.87 62.8,28.9 62.575,28.9 62.545,28.93 62.545,29.17 62.575,29.2 62.8,29.2 62.83,29.23 62.83,29.47 62.8,29.5 62.575,29.5 62.545,29.53 62.545,29.77 62.575,29.8 62.8,29.8 62.83,29.83 62.83,30.07 62.8,30.1 62.575,30.1 62.545,30.13 62.545,30.37 62.575,30.4 62.8,30.4 62.83,30.43 62.83,30.67 62.8,30.7 62.575,30.7 62.545,30.73 62.545,30.97 62.575,31 62.8,31 62.83,31.03 62.83,31.27 62.8,31.3 62.575,31.3 62.545,31.33 62.545,31.57 62.575,31.6 62.8,31.6 62.83,31.63 62.83,31.87 62.8,31.9 62.575,31.9 62.545,31.93 62.545,32.17 62.575,32.2 62.8,32.2 62.83,32.23 62.83,32.47 62.8,32.5 62.575,32.5 62.545,32.53 62.545,32.77 62.575,32.8 62.8,32.8 62.83,32.83 62.83,33.07 62.8,33.1 62.575,33.1 62.545,33.13 62.545,33.37 62.575,33.4 62.8,33.4 62.83,33.43 62.83,33.67 62.8,33.7 62.575,33.7 62.545,33.73 62.545,33.97 62.575,34 62.8,34 62.83,34.03 62.83,34.27 62.8,34.3 62.575,34.3 62.545,34.33 62.545,34.57 62.575,34.6 62.8,34.6 62.83,34.63 62.83,34.87 62.8,34.9 62.659,34.9 62.6,34.959 62.6,35.099 62.6,35.2 63.1,35.7 63.1,41.3 v1(63.5,41.7)
DDR_A1: U400.H1 U601.P7 | length 67.6
  L1 (Sig) w0.1: U400.H1@65.1,43.3 67.9,43.3 67.95,43.3 68.009,43.359 68.009,43.729 68.039,43.759 68.279,43.759 68.309,43.729 68.309,43.31 68.339,43.28 68.579,43.28 68.609,43.31 68.609,43.729 68.639,43.759 68.879,43.759 68.909,43.729 68.909,43.31 68.939,43.28 69.179,43.28 69.209,43.31 69.209,43.729 69.239,43.759 69.479,43.759 69.509,43.729 69.509,43.31 69.539,43.28 69.779,43.28 69.809,43.31 69.809,43.729 69.839,43.759 70.079,43.759 70.109,43.729 70.109,43.31 70.139,43.28 70.379,43.28 70.409,43.31 70.409,43.729 70.439,43.759 70.679,43.759 70.709,43.729 70.709,43.31 70.739,43.28 70.979,43.28 71.009,43.31 71.009,43.729 71.039,43.759 71.279,43.759 71.309,43.729 71.309,43.31 71.339,43.28 71.579,43.28 71.609,43.31 71.609,43.729 71.639,43.759 71.879,43.759 71.909,43.729 71.909,43.31 71.939,43.28 72.179,43.28 72.209,43.31 72.209,43.729 72.239,43.759 72.479,43.759 72.509,43.729 72.509,43.359 72.567,43.3 72.698,43.3 72.941,43.3 73,43.359 73,43.841 73.059,43.9 73.6,43.9 73.7,43.8 73.7,43.1 73.5,42.9 72.5,42.9 72.4,42.8 72,42.4 v1(72,29.9) ; v1(78.5,29.9) 78.5,30.31 78.5,30.36 78.441,30.419 77.98,30.419 77.95,30.449 77.95,30.689 77.98,30.719 78.506,30.719 78.536,30.749 78.536,30.989 78.506,31.019 77.98,31.019 77.95,31.049 77.95,31.289 77.98,31.319 78.506,31.319 78.536,31.349 78.536,31.589 78.506,31.619 77.98,31.619 77.95,31.649 77.95,31.889 77.98,31.919 78.506,31.919 78.536,31.949 78.536,32.189 78.506,32.219 77.98,32.219 77.95,32.249 77.95,32.489 77.98,32.519 78.506,32.519 78.536,32.549 78.536,32.789 78.506,32.819 77.98,32.819 77.95,32.849 77.95,33.089 77.98,33.119 78.506,33.119 78.536,33.149 78.536,33.389 78.506,33.419 77.98,33.419 77.95,33.449 77.95,33.689 77.98,33.719 78.506,33.719 78.536,33.749 78.536,33.989 78.506,34.019 77.98,34.019 77.95,34.049 77.95,34.289 77.98,34.319 78.506,34.319 78.536,34.349 78.536,34.589 78.506,34.619 77.98,34.619 77.95,34.649 77.95,34.889 77.98,34.919 78.441,34.919 78.5,34.978 78.5,35.214 78.5,35.5 78.7,35.7 78.7,37.5 78.5,37.7 78.5,39.541 78.559,39.6 U601.P7@79.1,39.6
  L6 (Sig) w0.1: v1(72,29.9) 72.3,29.9 72.35,29.9 72.409,29.959 72.409,30.046 72.439,30.076 72.679,30.076 72.709,30.046 72.709,29.777 72.739,29.747 72.979,29.747 73.009,29.777 73.009,30.046 73.039,30.076 73.279,30.076 73.309,30.046 73.309,29.777 73.339,29.747 73.579,29.747 73.609,29.777 73.609,30.046 73.639,30.076 73.879,30.076 73.909,30.046 73.909,29.777 73.939,29.747 74.179,29.747 74.209,29.777 74.209,30.046 74.239,30.076 74.479,30.076 74.509,30.046 74.509,29.959 74.567,29.9 74.899,29.9 75.6,29.9 75.65,29.9 75.709,29.959 75.709,30.957 75.739,30.987 75.979,30.987 76.009,30.957 76.009,29.905 76.039,29.875 76.279,29.875 76.309,29.905 76.309,30.957 76.339,30.987 76.579,30.987 76.609,30.957 76.609,29.905 76.639,29.875 76.879,29.875 76.909,29.905 76.909,30.957 76.939,30.987 77.179,30.987 77.209,30.957 77.209,29.905 77.239,29.875 77.479,29.875 77.509,29.905 77.509,30.957 77.539,30.987 77.779,30.987 77.809,30.957 77.809,29.959 77.867,29.9 78.314,29.9 v1(78.5,29.9)
DDR_A2: U400.E4 U601.P3 | length 67.1
  L1 (Sig) w0.1: v1(61.5,26.7) 61.909,26.7 61.959,26.7 62.018,26.759 62.018,26.92 62.048,26.95 62.288,26.95 62.318,26.92 62.318,26.696 62.348,26.666 62.588,26.666 62.618,26.696 62.618,26.92 62.648,26.95 62.888,26.95 62.918,26.92 62.918,26.696 62.948,26.666 63.188,26.666 63.218,26.696 63.218,26.92 63.248,26.95 63.488,26.95 63.518,26.92 63.518,26.696 63.548,26.666 63.788,26.666 63.818,26.696 63.818,26.92 63.848,26.95 64.088,26.95 64.118,26.92 64.118,26.696 64.148,26.666 64.388,26.666 64.418,26.696 64.418,26.92 64.448,26.95 64.688,26.95 64.718,26.92 64.718,26.696 64.748,26.666 64.988,26.666 65.018,26.696 65.018,26.92 65.048,26.95 65.288,26.95 65.318,26.92 65.318,26.696 65.348,26.666 65.588,26.666 65.618,26.696 65.618,26.92 65.648,26.95 65.888,26.95 65.918,26.92 65.918,26.696 65.948,26.666 66.188,26.666 66.218,26.696 66.218,26.92 66.248,26.95 66.488,26.95 66.518,26.92 66.518,26.696 66.548,26.666 66.788,26.666 66.818,26.696 66.818,26.92 66.848,26.95 67.088,26.95 67.118,26.92 67.118,26.696 67.148,26.666 67.388,26.666 67.418,26.696 67.418,26.92 67.448,26.95 67.688,26.95 67.718,26.92 67.718,26.696 67.748,26.666 67.988,26.666 68.018,26.696 68.018,26.92 68.048,26.95 68.288,26.95 68.318,26.92 68.318,26.696 68.348,26.666 68.588,26.666 68.618,26.696 68.618,26.92 68.648,26.95 68.888,26.95 68.918,26.92 68.918,26.696 68.948,26.666 69.188,26.666 69.218,26.696 69.218,26.92 69.248,26.95 69.488,26.95 69.518,26.92 69.518,26.696 69.548,26.666 69.788,26.666 69.818,26.696 69.818,26.92 69.848,26.95 70.088,26.95 70.118,26.92 70.118,26.696 70.148,26.666 70.388,26.666 70.418,26.696 70.418,26.92 70.448,26.95 70.688,26.95 70.718,26.92 70.718,26.696 70.748,26.666 70.988,26.666 71.018,26.696 71.018,26.92 71.048,26.95 71.288,26.95 71.318,26.92 71.318,26.696 71.348,26.666 71.588,26.666 71.618,26.696 71.618,26.92 71.648,26.95 71.888,26.95 71.918,26.92 71.918,26.696 71.948,26.666 72.188,26.666 72.218,26.696 72.218,26.92 72.248,26.95 72.488,26.95 72.518,26.92 72.518,26.696 72.548,26.666 72.788,26.666 72.818,26.696 72.818,26.92 72.848,26.95 73.088,26.95 73.118,26.92 73.118,26.696 73.148,26.666 73.388,26.666 73.418,26.696 73.418,26.92 73.448,26.95 73.688,26.95 73.718,26.92 73.718,26.696 73.748,26.666 73.988,26.666 74.018,26.696 74.018,26.92 74.048,26.95 74.288,26.95 74.318,26.92 74.318,26.696 74.348,26.666 74.588,26.666 74.618,26.696 74.618,26.92 74.648,26.95 74.888,26.95 74.918,26.92 74.918,26.696 74.948,26.666 75.188,26.666 75.218,26.696 75.218,26.92 75.248,26.95 75.488,26.95 75.518,26.92 75.518,26.696 75.548,26.666 75.788,26.666 75.818,26.696 75.818,26.92 75.848,26.95 76.088,26.95 76.118,26.92 76.118,26.759 76.176,26.7 76.3,26.7 76.398,26.798 76.5,26.9 76.5,27.234 76.5,27.284 76.441,27.342 76.352,27.342 76.322,27.372 76.322,27.612 76.352,27.642 76.645,27.642 76.675,27.672 76.675,27.912 76.645,27.942 76.352,27.942 76.322,27.972 76.322,28.212 76.352,28.242 76.645,28.242 76.675,28.272 76.675,28.512 76.645,28.542 76.352,28.542 76.322,28.572 76.322,28.812 76.352,28.842 76.645,28.842 76.675,28.872 76.675,29.112 76.645,29.142 76.352,29.142 76.322,29.172 76.322,29.412 76.352,29.442 76.645,29.442 76.675,29.472 76.675,29.712 76.645,29.742 76.352,29.742 76.322,29.772 76.322,30.012 76.352,30.042 76.645,30.042 76.675,30.072 76.675,30.312 76.645,30.342 76.352,30.342 76.322,30.372 76.322,30.612 76.352,30.642 76.645,30.642 76.675,30.672 76.675,30.912 76.645,30.942 76.352,30.942 76.322,30.972 76.322,31.212 76.352,31.242 76.645,31.242 76.675,31.272 76.675,31.512 76.645,31.542 76.352,31.542 76.322,31.572 76.322,31.812 76.352,31.842 76.645,31.842 76.675,31.872 76.675,32.112 76.645,32.142 76.352,32.142 76.322,32.172 76.322,32.412 76.352,32.442 76.645,32.442 76.675,32.472 76.675,32.712 76.645,32.742 76.352,32.742 76.322,32.772 76.322,33.012 76.352,33.042 76.645,33.042 76.675,33.072 76.675,33.312 76.645,33.342 76.352,33.342 76.322,33.372 76.322,33.612 76.352,33.642 76.441,33.642 76.5,33.701 76.5,33.8 76.5,34.089 76.7,34.289 76.7,39.541 76.641,39.6 U601.P3@75.9,39.6
  L6 (Sig) w0.1: v1(61.5,26.7) 61.5,27 61.5,27.05 61.441,27.109 61.187,27.109 61.157,27.139 61.157,27.379 61.187,27.409 61.47,27.409 61.5,27.439 61.5,27.679 61.47,27.709 61.187,27.709 61.157,27.739 61.157,27.979 61.187,28.009 61.47,28.009 61.5,28.039 61.5,28.279 61.47,28.309 61.187,28.309 61.157,28.339 61.157,28.579 61.187,28.609 61.47,28.609 61.5,28.639 61.5,28.879 61.47,28.909 61.187,28.909 61.157,28.939 61.157,29.179 61.187,29.209 61.47,29.209 61.5,29.239 61.5,29.479 61.47,29.509 61.187,29.509 61.157,29.539 61.157,29.779 61.187,29.809 61.47,29.809 61.5,29.839 61.5,30.079 61.47,30.109 61.187,30.109 61.157,30.139 61.157,30.379 61.187,30.409 61.47,30.409 61.5,30.439 61.5,30.679 61.47,30.709 61.187,30.709 61.157,30.739 61.157,30.979 61.187,31.009 61.47,31.009 61.5,31.039 61.5,31.279 61.47,31.309 61.187,31.309 61.157,31.339 61.157,31.579 61.187,31.609 61.441,31.609 61.5,31.667 61.5,32.026 61.5,38.841 61.559,38.9 62.241,38.9 62.3,38.959 62.3,40.5 v1(62.7,40.9)
DDR_A3: U400.C3 U601.N2 | length 65.9
  L1 (Sig) w0.1: U400.C3@63.5,39.3 63.1,38.9 63.1,36.2 63.2,36.1 65.041,36.1 65.1,36.041 65.1,35.8 65.1,35.742 65.159,35.683 65.32,35.683 65.35,35.653 65.35,35.413 65.32,35.383 65.051,35.383 65.021,35.353 65.021,35.113 65.051,35.083 65.32,35.083 65.35,35.053 65.35,34.813 65.32,34.783 65.051,34.783 65.021,34.753 65.021,34.513 65.051,34.483 65.32,34.483 65.35,34.453 65.35,34.213 65.32,34.183 65.051,34.183 65.021,34.153 65.021,33.913 65.051,33.883 65.32,33.883 65.35,33.853 65.35,33.613 65.32,33.583 65.051,33.583 65.021,33.553 65.021,33.313 65.051,33.283 65.32,33.283 65.35,33.253 65.35,33.013 65.32,32.983 65.051,32.983 65.021,32.953 65.021,32.713 65.051,32.683 65.32,32.683 65.35,32.653 65.35,32.413 65.32,32.383 65.051,32.383 65.021,32.353 65.021,32.113 65.051,32.083 65.32,32.083 65.35,32.053 65.35,31.813 65.32,31.783 65.051,31.783 65.021,31.753 65.021,31.513 65.051,31.483 65.32,31.483 65.35,31.453 65.35,31.213 65.32,31.183 65.051,31.183 65.021,31.153 65.021,30.913 65.051,30.883 65.32,30.883 65.35,30.853 65.35,30.613 65.32,30.583 65.159,30.583 65.1,30.525 65.1,30.175 65.1,29.4 v1(66.2,28.3) ; v1(73.8,28.1) 73.8,29.095 73.8,29.145 73.741,29.203 73.58,29.203 73.55,29.233 73.55,29.473 73.58,29.503 73.83,29.503 73.86,29.533 73.86,29.773 73.83,29.803 73.58,29.803 73.55,29.833 73.55,30.073 73.58,30.103 73.83,30.103 73.86,30.133 73.86,30.373 73.83,30.403 73.58,30.403 73.55,30.433 73.55,30.673 73.58,30.703 73.83,30.703 73.86,30.733 73.86,30.973 73.83,31.003 73.58,31.003 73.55,31.033 73.55,31.273 73.58,31.303 73.83,31.303 73.86,31.333 73.86,31.573 73.83,31.603 73.58,31.603 73.55,31.633 73.55,31.873 73.58,31.903 73.83,31.903 73.86,31.933 73.86,32.173 73.83,32.203 73.58,32.203 73.55,32.233 73.55,32.473 73.58,32.503 73.83,32.503 73.86,32.533 73.86,32.773 73.83,32.803 73.58,32.803 73.55,32.833 73.55,33.073 73.58,33.103 73.83,33.103 73.86,33.133 73.86,33.373 73.83,33.403 73.58,33.403 73.55,33.433 73.55,33.673 73.58,33.703 73.83,33.703 73.86,33.733 73.86,33.973 73.83,34.003 73.58,34.003 73.55,34.033 73.55,34.273 73.58,34.303 73.83,34.303 73.86,34.333 73.86,34.573 73.83,34.603 73.58,34.603 73.55,34.633 73.55,34.873 73.58,34.903 73.83,34.903 73.86,34.933 73.86,35.173 73.83,35.203 73.58,35.203 73.55,35.233 73.55,35.473 73.58,35.503 73.83,35.503 73.86,35.533 73.86,35.773 73.83,35.803 73.58,35.803 73.55,35.833 73.55,36.073 73.58,36.103 73.83,36.103 73.86,36.133 73.86,36.373 73.83,36.403 73.58,36.403 73.55,36.433 73.55,36.673 73.58,36.703 73.83,36.703 73.86,36.733 73.86,36.973 73.83,37.003 73.58,37.003 73.55,37.033 73.55,37.273 73.58,37.303 73.83,37.303 73.86,37.333 73.86,37.573 73.83,37.603 73.58,37.603 73.55,37.633 73.55,37.873 73.58,37.903 73.83,37.903 73.86,37.933 73.86,38.173 73.83,38.203 73.58,38.203 73.55,38.233 73.55,38.473 73.58,38.503 73.83,38.503 73.86,38.533 73.86,38.773 73.83,38.803 73.58,38.803 73.55,38.833 73.55,39.073 73.58,39.103 73.741,39.103 73.8,39.162 73.8,39.8 73.8,39.9 73.9,40 74.7,40 U601.N2@75.1,40.4
  L6 (Sig) w0.1: v1(66.2,28.3) 66.26,28.3 66.46,28.1 66.899,28.1 67.249,28.1 67.307,28.041 67.307,27.29 67.337,27.26 67.577,27.26 67.607,27.29 67.607,28.125 67.637,28.155 67.877,28.155 67.907,28.125 67.907,27.29 67.937,27.26 68.177,27.26 68.207,27.29 68.207,28.125 68.237,28.155 68.477,28.155 68.507,28.125 68.507,27.29 68.537,27.26 68.777,27.26 68.807,27.29 68.807,28.125 68.837,28.155 69.077,28.155 69.107,28.125 69.107,27.29 69.137,27.26 69.377,27.26 69.407,27.29 69.407,28.125 69.437,28.155 69.677,28.155 69.707,28.125 69.707,27.29 69.737,27.26 69.977,27.26 70.007,27.29 70.007,28.125 70.037,28.155 70.277,28.155 70.307,28.125 70.307,27.29 70.337,27.26 70.577,27.26 70.607,27.29 70.607,28.125 70.637,28.155 70.877,28.155 70.907,28.125 70.907,27.29 70.937,27.26 71.177,27.26 71.207,27.29 71.207,28.125 71.237,28.155 71.477,28.155 71.507,28.125 71.507,27.29 71.537,27.26 71.777,27.26 71.807,27.29 71.807,28.125 71.837,28.155 72.077,28.155 72.107,28.125 72.107,27.29 72.137,27.26 72.377,27.26 72.407,27.29 72.407,28.125 72.437,28.155 72.677,28.155 72.707,28.125 72.707,27.29 72.737,27.26 72.977,27.26 73.007,27.29 73.007,28.041 73.066,28.1 73.471,28.1 v1(73.8,28.1)